# Altium PCB DIO_RJ45_DIOT.PCBDOC (part 2 of 6)
Units mil, origin at the board's own origin, x right, y up, seen from the top; angles counter-clockwise.
Board outline 8758.72 x 3941.04 mil, 4 copper layers (TopLayer, MidLayer1, Internal Plane 1, BottomLayer), stack 46.562 mil thick; 318 components, 196 nets, 1276 pads, 687 vias.
Unrouted connection lines stored in the file: 2.
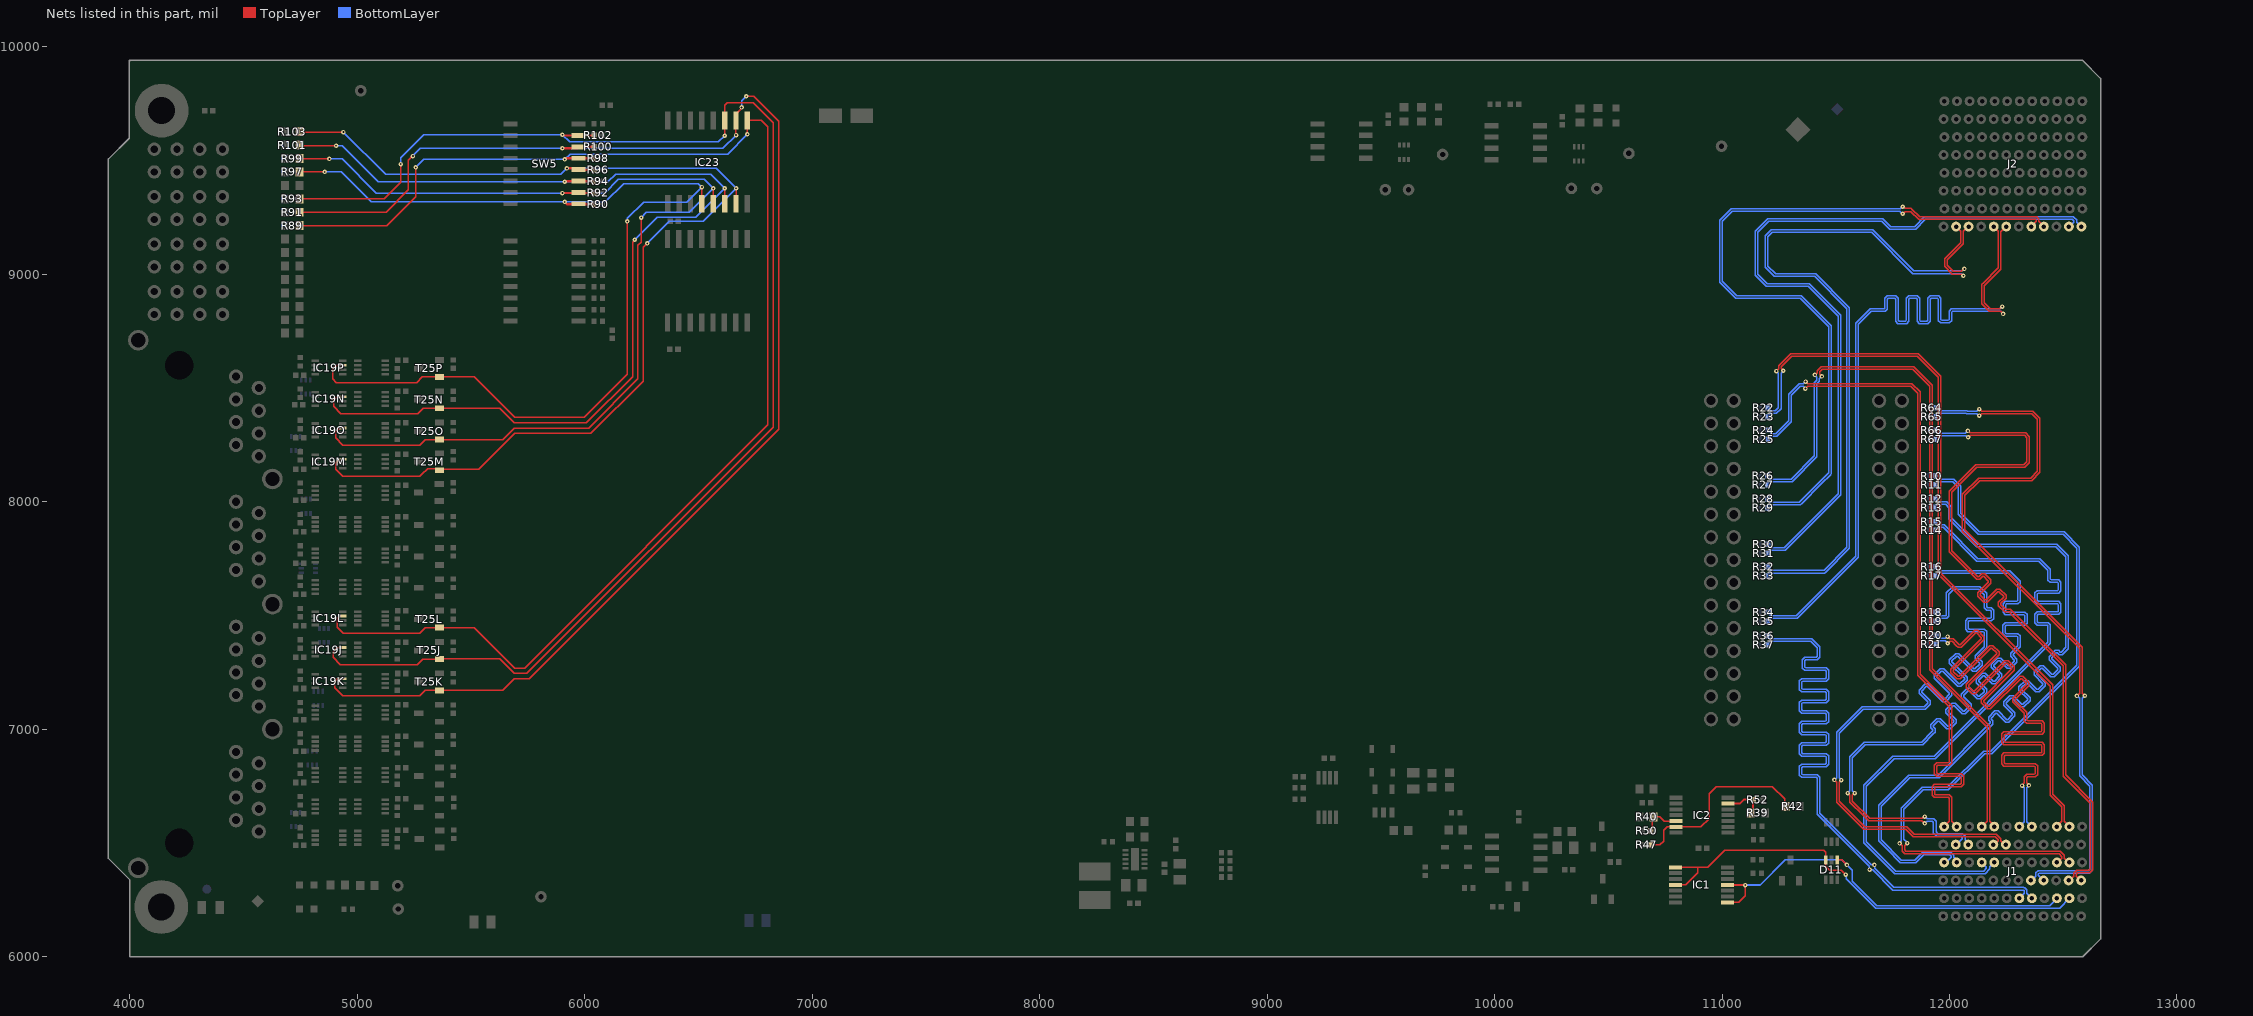
[diagram p4: the nets of this part, all layers, seen from the top]

## Footprints (in the part's own frame and the unit in brackets; to place one, negate y for a bottom-side part, rotate by r counter-clockwise, add the part's x,y. Pads: shape width x height; smd on the part's side, far side on the other; paste and mask are expansions set on the pad) (continued)
SOT95P280X145-5N [mm] "SOT, 0.95mm pitch; 5 pin, 1.60mm W X 2.90mm L X 1.45mm H body, IPC Medium Density"
  rect 1.1x0.6 smd: 1(-1.3,0.95) 2(-1.3,0) 3(-1.3,-0.95) 4(1.3,-0.95) 5(1.3,0.95)
  silkscreen extent -1.72,-1.45 0.43,1.87, body extent -1.4,-1.5 1.4,1.5, height 1.45
SOTFL50P160X60-6N [mm] "SOTFL (SOT666), 0.50mm, Pitch; 6 Pin, 1.20mm W X 1.60mm L X 0.60mm H Body, IPC Medium Density"
  rect 0.57x0.3 smd: 1(-0.79,0.5) 2(-0.79,0) 3(-0.79,-0.5) 4(0.79,-0.5) 5(0.79,0) 6(0.79,0.5)
  silkscreen extent -1.22,-0.8 0,1.27, body extent -0.85,-0.85 0.85,0.85, height 0.6
SW_TYCO_1-1571983-0 [mm] "Pitch 1.27mm,  Body 11.28x6.2mm, 8 Ways SPST Surface-Mount DIP Switch, TYCO GDH Serie"
  rect 1.55x0.55 smd: 1(-3.8,4.445) 2(-3.8,3.175) 3(-3.8,1.905) 4(-3.8,0.635) 5(-3.8,-0.635) 6(-3.8,-1.905) 7(-3.8,-3.175) 8(-3.8,-4.445) 9(3.8,-4.445) 10(3.8,-3.175) 11(3.8,-1.905) 12(3.8,-0.635) 13(3.8,0.635) 14(3.8,1.905) 15(3.8,3.175) 16(3.8,4.445)
  silkscreen extent -4.43,-5.65 2.7,5.65, body extent -4.06,-5.64 4.06,5.64, height 2.36
TYCO_5406203-3 [mm] "4 x RJ45 Jacks - 8 Positions"
  round 1.6 hole 0.9: 1A(-16.51,1.27) 1B(-2.54,1.27) 1C(11.43,1.27) 1D(25.4,1.27) 2A(-17.78,-1.27) 2B(-3.81,-1.27) 2C(10.16,-1.27) 2D(24.13,-1.27) 3A(-19.05,1.27) 3B(-5.08,1.27) 3C(8.89,1.27) 3D(22.86,1.27) 4A(-20.32,-1.27) 4B(-6.35,-1.27) 4C(7.62,-1.27) 4D(21.59,-1.27) 5A(-21.59,1.27) 5B(-7.62,1.27) 5C(6.35,1.27) 5D(20.32,1.27) 6A(-22.86,-1.27) 6B(-8.89,-1.27) 6C(5.08,-1.27) 6D(19.05,-1.27) 7A(-24.13,1.27) 7B(-10.16,1.27) 7C(3.81,1.27) 7D(17.78,1.27) 8A(-25.4,-1.27) 8B(-11.43,-1.27) 8C(2.54,-1.27) 8D(16.51,-1.27)
  round 0.5 hole 3.2 unplated mask+1.35: M1(26.67,7.62) M2(-26.67,7.62)
  round 2.3 hole 1.6: SH(-29.46,12.19) SH(-13.97,-2.792) SH(0,-2.792) SH(13.97,-2.792) SH(29.46,12.19)
  silkscreen extent -30.51,-2.92 30.51,18.42, body extent -30.51,-2.92 30.51,18.42, height 14.55

## Part data
B1 B2 B3 B4 B5 B6 B7 B8 B9 B10 B11: library part PLATED_HOLE0.6_PAD1.3, "Single Terminal Socket", Author="CERN DEM MR", Component Type="Standard (No BOM)", ComponentHeight=0mm, CreateDate=02.03.2016, Family="Plated Hole", HelpURL=Undefined, LatestRevisionDate=02.03.2016, Mounted=No, PackageDescription="Plated Through Hole: Hole Dia.=0.6mm Pad Dia.=1.3mm", Part Description="Plated Through Hole: Hole Dia.=0.6mm Pad Dia.=1.3mm", Part Number=PLATED_HOLE0.6_PAD1.3, Pin Count=1, Sense=No, SMD=No, Socket=No, Status=None
C1: library part CC0402_22PF_50V_5%_C0G, "Non-polarised capacitor", Case=0402, Manufacturer=GENERIC, Manufacturer1 ComponentHeight=0.55mm, Manufacturer1 Example=KEMET, Manufacturer1 Part Number=C0402C220J5GACTU, Tolerance=±5%, Voltage=50V, Author="CERN DEM JLC", Component Type=Standard, CreateDate=2007-12-03, HelpURL="\\cern.ch\dfs\Applications\Altium\Datasheets\CC0402_C0G_KEMET_(Commercial Grade).pdf", LatestRevisionDate=2007-12-03, Manufacturer Part Number=CC0402_22PF_50V_5%_C0G, Mounted=Yes, Part Description="SMD Multilayer Chip Ceramic Capacitor", Part Number=CC0402_22PF_50V_5%_C0G, Pin Count=2, Sense=No, SMD=Yes, Socket=No, Status=Preferred, TC=C0G/NP0
C3 C5 C8 C10 C46A C46B C46C C46D C46E C46F C46G C46H C46I C46J C46K C46L C46M C46N C46O C46P C47A C47B C47C C47D C47E C47F C47G C47H C47I C47J C47K C47L C47M C47N C47O C47P C57 C58 C60 C61 C63 C64 C65 C67: library part CC0402_100NF_16V_10%_X5R, "Non-polarised capacitor", Case=0402, Manufacturer=GENERIC, Manufacturer1 ComponentHeight=0.55mm, Manufacturer1 Example=MURATA, Manufacturer1 Part Number=GRM155R61C104KA88D, Tolerance=±10%, Voltage=16V, Author="CERN DEM JLC", Component Type=Standard, CreateDate=10.12.2013, HelpURL=\\cern.ch\dfs\Applications\Altium\Datasheets\CC0402_X5R_MURATA_GRM.pdf, LatestRevisionDate=10.12.2013, Manufacturer Part Number=CC0402_100NF_16V_10%_X5R, Mounted=Yes, Part Description="SMD Multilayer Chip Ceramic Capacitor", Part Number=CC0402_100NF_16V_10%_X5R, Pin Count=2, Sense=No, SMD=Yes, Socket=No, Status=None, TC=X5R
C4: library part CC0603_100NF_50V_10%_X7R, "Non-polarised capacitor", Case=0603, Manufacturer=GENERIC, Manufacturer1 ComponentHeight=0.87mm, Manufacturer1 Example=PHYCOMP, Manufacturer1 Part Number=223858615649, Tolerance=±10%, Voltage=50V, Author="CERN DEM JLC", Component Type=Standard, CreateDate=03.12.2007, HelpURL=\\cern.ch\dfs\Applications\Altium\Datasheets\CC0603_X7R_PHYCOMP.pdf, LatestRevisionDate=03.12.2007, Manufacturer Part Number=CC0603_100NF_50V_10%_X7R, Mounted=Yes, Part Description="SMD Multilayer Chip Ceramic Capacitor", Part Number=CC0603_100NF_50V_10%_X7R, Pin Count=2, Sense=No, SMD=Yes, Socket=No, Status=Preferred, TC=X7R
C7 C25 C66 C68: library part CC0805_22UF_16V_10%_X5R, "Non-polarised capacitor", Case=0805, Manufacturer=GENERIC, Manufacturer1 ComponentHeight=1.35mm, Manufacturer1 Example=TDK, Manufacturer1 Part Number=C2012X5R1C226KT, Tolerance=±10%, Voltage=16V, Author="CERN DEM JLC", Component Type=Standard, CreateDate=25.10.2012, HelpURL=\\cern.ch\dfs\Applications\Altium\Datasheets\CC0805_X5R_TDK_C.pdf, LatestRevisionDate=25.10.2012, Manufacturer Part Number=CC0805_22UF_16V_10%_X5R, Mounted=Yes, Part Description="SMD Multilayer Chip Ceramic Capacitor", Part Number=CC0805_22UF_16V_10%_X5R, Pin Count=2, Sense=No, SMD=Yes, Socket=No, Status=Preferred, TC=X5R
C9: library part CC0603_1UF_16V_10%_X7R, "Non-polarised capacitor", Case=0603, Manufacturer=GENERIC, Manufacturer1 ComponentHeight=0.9mm, Manufacturer1 Example="YAGEO PHYCOMP", Manufacturer1 Part Number=223878615663, Tolerance=±10%, Voltage=16V, Author="CERN DEM JLC", Component Type=Standard, CreateDate=03.12.2007, HelpURL=\\cern.ch\dfs\Applications\Altium\Datasheets\CC0603_X7R_PHYCOMP.pdf, LatestRevisionDate=17.04.2015, Manufacturer Part Number=CC0603_1UF_16V_10%_X7R, Mounted=Yes, Part Description="SMD Multilayer Chip Ceramic Capacitor", Part Number=CC0603_1UF_16V_10%_X7R, Pin Count=2, Sense=No, SMD=Yes, Socket=No, Status=None, TC=X7R
C23 C24: library part CC0603_1UF_25V_10%_X7R, "Non-polarised capacitor", Case=0603, Manufacturer=GENERIC, Manufacturer1 ComponentHeight=0.9mm, Manufacturer1 Example=MURATA, Manufacturer1 Part Number=GRM188R71E105KA12D, Tolerance=±10%, Voltage=25V, Author="CERN DEM JLC", Component Type=Standard, CreateDate=18.01.2011, HelpURL=\\cern.ch\dfs\Applications\Altium\Datasheets\CC0603_X7R_MURATA.pdf, LatestRevisionDate=18.01.2011, Manufacturer Part Number=CC0603_1UF_25V_10%_X7R, Mounted=Yes, Part Description="SMD Multilayer Chip Ceramic Capacitor", Part Number=CC0603_1UF_25V_10%_X7R, Pin Count=2, Sense=No, SMD=Yes, Socket=No, Status=None, TC=X7R
C62: library part CAE430-540_10UF_16V_20%, "Polarised capacitor", Case=B, Manufacturer=PANASONIC, Manufacturer Part Number=EEEFK1C100AR, Tolerance=±20%, Voltage=16V, Author="CERN DEM JLC", Component Type=Standard, ComponentHeight=5.8mm, CreateDate=03.12.2007, HelpURL=\\cern.ch\dfs\Applications\Altium\Datasheets\CAE_PANASONIC_FK.pdf, LatestRevisionDate=05.11.2014, Mounted=Yes, Part Description="Aluminum Electrolytic SMT Capacitor", Part Number=CAE430-540_10UF_16V_20%, Pin Count=2, Sense=No, SMD=Yes, Socket=No, Status="Not Recommended"
D1 D2 D3 D4 D5 D6 D7 D8 D9 D10: Manufacturer="ON SEMICONDUCTOR", Voltage=5.5V, Author="CERN DEM JLC", Bonding=No, Component Type=Standard, ComponentHeight=1.75mm, CreateDate=05.12.2012, Device=NUP4114UPXV6T1G, HelpURL=\\cern.ch\dfs\Applications\Altium\Datasheets\NUP4114UPXV6T1G.pdf, LatestRevisionDate=05.12.2012, Manufacturer Part Number=NUP4114UPXV6T1G, Mounted=Yes, PackageDescription="SOTFL (SOT666, SOT563,), 0.50mm, Pitch; 6 Pin, 1.20mm W X 1.60mm L X 0.60mm H Body, IPC Medium Density", Part Description="ESD Protection Diodes Array (8kV) with Low Clamping Voltage", Part Number=NUP4114UPXV6T1G, Pin Count=8, PressFit=No, Sense=No, SMD=Yes, Socket=No
D11 D12: "Fivefold ESD Protection Diode Arrays", Case=SOT363, Manufacturer=NEXPERIA, Power=200W, Voltage=3.3V, Author="CERN DEM WB", Bonding=No, Component Type=Standard, ComponentHeight=1.1mm, CreateDate=05.07.2021, Device=PESD3V3L5UY, HelpURL=\\cern.ch\dfs\Applications\Altium\Datasheets\PESD3V3L5UY.pdf, LatestRevisionDate=05.07.2021, Manufacturer Part Number=PESD3V3L5UY, Mounted=Yes, PackageDescription="SOT363, SC-88, 0.65mm Pitch; 6 Pin, 1.25mm W X 2.00mm L X 1.10mm H body, IPC Medium Density", Part Description="Fivefold ESD Protection Diode Arrays (30kV)", Part Number=PESD3V3L5UY, Pin Count=6, PressFit=No, Sense=No, SMD=Yes, Socket=No
D13 D14 D15 D16: "Schottky Diode", Case=SOD323, Manufacturer=INFINEON, Power=750mA, Voltage=40V, Author="CERN DEM JLC", Bonding=No, Component Type=Standard, ComponentHeight=1.1mm, CreateDate=12.11.2014, Device=BAT165, HelpURL=\\cern.ch\dfs\Applications\Altium\Datasheets\BAT165.pdf, LatestRevisionDate=12.11.2014, Manufacturer Part Number=BAT165, Mounted=Yes, PackageDescription="Small Outline Diode (SOD-323), 1.70mm W X 1.25mm L X 1.10mm H body,  IPC Medium Density", Part Description="Medium Power AF Schottky Diode", Part Number=BAT165, Pin Count=2, PressFit=No, Sense=No, SMD=Yes, Socket=No
FTG21: library part FIDUCIAL_TARGET_C100-200, "Fiducial Target", Author="CERN DEM JLC", Component Type="Standard (No BOM)", ComponentHeight=0mm, CreateDate=09.02.2010, Family=Fiducial, HelpURL=Undefined, LatestRevisionDate=04.04.2012, Mounted=No, PackageDescription="Round Fiducial Target, Top Layer, 1.0mm, Top Solder 2.0mm, Keepout =2.0mm", Part Description="Round Fiducial Target, Top Layer, 1.0mm, Top Solder 2.0mm, Keepout =2.0mm", Part Number=FIDUCIAL_TARGET_C100-200, Pin Count=1, Sense=No, SMD=Yes, Socket=No, Status=None
FTG22 FTG24: library part FIDUCIAL_TARGET_S100-200, "Fiducial Target", Author="CERN DEM JLC", Component Type="Standard (No BOM)", ComponentHeight=0mm, CreateDate=09.02.2010, Family=Fiducial, HelpURL=Undefined, LatestRevisionDate=04.04.2012, Mounted=No, PackageDescription="Square Fiducial Target, Top Layer, 1.0mm, Top Solder 2.0mm, Keepout =2.0mm", Part Description="Square Fiducial Target, Top Layer, 1.0mm, Top Solder 2.0mm, Keepout =2.0mm", Part Number=FIDUCIAL_TARGET_S100-200, Pin Count=1, Sense=No, SMD=Yes, Socket=No, Status=None
FTG23: library part FIDUCIAL_TARGET_S200-400, "Fiducial Target", Author="CERN DEM JLC", Component Type="Standard (No BOM)", ComponentHeight=0mm, CreateDate=02.06.2008, Family=Fiducial, HelpURL=Undefined, LatestRevisionDate=04.04.2012, Mounted=No, PackageDescription="Square Fiducial Target, Top Layer, 2.0mm, Top Solder 4.0mm, Keepout =4.0mm", Part Description="Square Fiducial Target, Top Layer, 2.0mm, Top Solder 4.0mm, Keepout =4.0mm", Part Number=FIDUCIAL_TARGET_S200-400, Pin Count=1, Sense=No, SMD=Yes, Socket=No, Status=None
IC1 IC2: Case=TSSOP14, Manufacturer="NXP SEMICONDUCTORS", Author="CERN DEM JLC", Bonding=No, Component Type=Standard, ComponentHeight=1.1mm, Device=74HC4066PW, HelpURL=\\cern.ch\dfs\Applications\Altium\Datasheets\74HC4066PW.pdf, Manufacturer Part Number=74HC4066PW, Mounted=Yes, Part Description="Quad Single-Pole Single-Throw Analog Switch", Part Number=74HC4066PW, Pin Count=14, PressFit=No, SMD=Yes, Socket=No
  IC1: CreateDate=19.11.2014, LatestRevisionDate=19.11.2014, PackageDescription="SOP, 0.65mm Pitch; 14 Pin, 4.40mm W X 5.00mm L X 1.20mm H body, IPC Medium Density", Sense=No
  IC2: CreateDate=2014-11-19, LatestRevisionDate=2014-11-19, PackageDescription="SOP, 14-Leads, Body 4.4x5mm (max), Pitch 0.65mm, IPC Medium Density", Table="Standard Logic"
IC3: "LinCMOS Timer", Case=SOIC8, Manufacturer="TEXAS INSTRUMENTS", Author="CERN DEM JMW", Bonding=No, Component Type=Standard, ComponentHeight=1.75mm, CreateDate=23.08.2016, Device=TLC555ID, HelpURL=\\cern.ch\dfs\Applications\Altium\Datasheets\TLC555ID.pdf, LatestRevisionDate=23.08.2016, Manufacturer Part Number=TLC555ID, Mounted=Yes, PackageDescription="SOIC 8, Pitch 1.27mm, Body 4x5mm, IPC Medium Density", Part Description="LinCMOS Timer", Part Number=TLC555ID, Pin Count=8, PressFit=No, Sense=No, SMD=Yes, Socket=No
IC4: "Digital Temperature Sensor and Thermal Watchdog with Two-Wire Interface", Case=SSOP8, Manufacturer="TEXAS INSTRUMENTS", Author="CERN DEM JLC", Bonding=No, Component Type=Standard, ComponentHeight=1.09mm, CreateDate=15.10.2012, Device=LM75AIMM/NOPB, HelpURL=\\cern.ch\dfs\Applications\Altium\Datasheets\LM75AIMM-NOPB.pdf, LatestRevisionDate=15.10.2012, Manufacturer Part Number=LM75AIMM/NOPB, Mounted=Yes, PackageDescription="SOP, 0.65mm pitch; 8 pin,3.00mm W X 3.00mm L X 1.09mm H bodyI, PC Medium Density", Part Description="-25° to +100°C ±2°C Digital Temperature Sensor and Thermal Watchdog with Two-Wire Interface", Part Number=LM75AIMM/NOPB, Pin Count=8, PressFit=No, Sense=No, SMD=Yes, Socket=No
IC5: "500mA Peak Output LDO Regulator", Case=SOT23-5, Manufacturer="MICROCHIP TECHNOLOGY", Author="CERN DEM WB", Bonding=No, Component Type=Standard, ComponentHeight=1.45mm, CreateDate=2019-04-16, Device=MIC5219-3.3YM5, HelpURL=\\cern.ch\dfs\Applications\Altium\Datasheets\MIC5219-3.3YM5.pdf, LatestRevisionDate=2019-04-16, Manufacturer Part Number=MIC5219-3.3YM5, Mounted=Yes, PackageDescription="SOT, 0.95mm pitch; 5 pin, 1.60mm W X 2.90mm L X 1.45mm H body, IPC Medium Density", Part Description="3.3V 500mA Peak Output Low Drop-Out  (LDO) Regulator", Part Number=MIC5219-3.3YM5, Pin Count=5, PressFit=No, Sense=No, SMD=Yes, Socket=No
IC19A IC19B IC19C IC19D IC19E IC19F IC19G IC19H IC19I IC19J IC19K IC19L IC19M IC19N IC19O IC19P IC20A IC20B IC20C IC20D IC20E IC20F IC20G IC20H IC20I IC20J IC20K IC20L IC20M IC20N IC20O IC20P: "LVDS Single Port High Speed Repeater", Case=TSSOP8, Manufacturer="FAIRCHILD SEMICONDUCTOR", Author="CERN DEM JLC", Bonding=No, Component Type=Standard, ComponentHeight=0.8mm, CreateDate=08.11.2016, Device=FIN1101K8X, HelpURL=\\cern.ch\dfs\Applications\Altium\Datasheets\FIN1101K8X.pdf, LatestRevisionDate=08.11.2016, Manufacturer Part Number=FIN1101K8X, Mounted=Yes, PackageDescription="SOP, 0.50mm Pitch; 8 pin, 2.30mm W X 2.00mm L X 0.90mm H body, PC Medium Density", Part Description="LVDS Single Port High Speed Repeater", Part Number=FIN1101K8X, Pin Count=8, PressFit=No, Sense=No, SMD=Yes, Socket=No
IC23 IC25: "Remote 8-bit I/O Expander For I2C Bus", Case=SOIC16W, Manufacturer="TEXAS INSTRUMENTS", Author="CERN DEM JLC", Bonding=No, Component Type=Standard, ComponentHeight=2.65mm, CreateDate=01.11.2012, Device=PCF8574ADW, HelpURL=\\cern.ch\dfs\Applications\Altium\Datasheets\PCF8574ADW.pdf, LatestRevisionDate=01.11.2012, Manufacturer Part Number=PCF8574ADW, Mounted=Yes, PackageDescription="SOIC 16, Pitch 1.27mm - Body 7.5x10.3mm, IPC Medium Density", Part Description="Remote 8-bit I/O Expander For I2C Bus", Part Number=PCF8574ADW, Pin Count=16, PressFit=No, Sense=No, SMD=Yes, Socket=No
IC24 IC26: "1.7V-5.5V, 2K I2C™ Serial EEPROMs with EUI-48™ Node Identity", Case=SOIC8, Manufacturer="MICROCHIP TECHNOLOGY", Author="CERN DEM MR", Bonding=No, Component Type=Standard, ComponentHeight=1.75mm, CreateDate=19.07.2016, Device=24AA025E48-I/SN, HelpURL=\\cern.ch\dfs\Applications\Altium\Datasheets\24AA025E48-I-SN.pdf, LatestRevisionDate=19.07.2016, Manufacturer Part Number=24AA025E48-I/SN, Mounted=Yes, PackageDescription="SOIC, 1.27mm Pitch; 8 Pin - Body 4x5mm, IPC Medium Density", Part Description="1.7V-5.5V, 2K I2C™ Serial EEPROMs with EUI-48™ Node Identity", Part Number=24AA025E48-I/SN, Pin Count=8, PressFit=No, Sense=No, SMD=Yes, Socket=No
IC27: "4.75-28VDC to 1-6VDC, 500mA Step-Down Converter With Sleep Mode", Case=SON10, Manufacturer="TEXAS INSTRUMENTS", Author="CERN DEM JMW", Bonding=No, Component Type=Standard, ComponentHeight=0.8mm, CreateDate=11.08.2015, Device=TPS62175DQC, HelpURL=\\cern.ch\dfs\Applications\Altium\Datasheets\TPS62175DQC.pdf, LatestRevisionDate=11.08.2015, Manufacturer Part Number=TPS62175DQC, Mounted=Yes, PackageDescription="SON, 10-Leads, Body 2x3mm, Pitch 0.5mm, Thermal Pad 0.94x2.5mm, IPC Medium Density", Part Description="4.75-28VDC to 1-6VDC, 500mA Step-Down Converter With Sleep Mode", Part Number=TPS62175DQC, Pin Count=11, PressFit=No, Sense=No, SMD=Yes, Socket=No
J1: library part AMPHENOL_10052825-101LF, "72 Contacts Header, 6 Columns, 4 Pairs per Column"
J2: library part AMPHENOL_10052838-101LF, "96 Contacts Header, 8 Columns, 4 Pairs per Column"
J14 J24: library part 3M_N2530-6002RB, "Connector 30 Male", Manufacturer=3M, Manufacturer Part Number=N2530-6002RB, Author="CERN DEM JLC", Component Type=Standard, ComponentHeight=10.03mm, CreateDate=11.02.2009, Family="Header 30", HelpURL=\\cern.ch\dfs\Applications\Altium\Datasheets\3M_N2530-6002RB.pdf, LatestRevisionDate=11.08.2009, Mounted=Yes, Part Description="30 Contacts - Straight .100'' x .100'' Low Profile Four-Wall Header, 2500 Series", Part Number=3M_N2530-6002RB, Pin Count=30, PressFit=No, Sense=No, SMD=No, Socket=No, Status=None
J15: library part TYCO_5406203-3, "Connector 4 x RJ45 + Shield", Manufacturer="TYCO ELECTRONICS", Manufacturer Part Number=5406203-3, Author="CERN DEM JLC", Component Type=Standard, ComponentHeight=13.64mm, CreateDate=30.10.2008, Family=RJ45, HelpURL=\\cern.ch\dfs\Applications\Altium\Datasheets\TYCO_5406203-3.pdf, LatestRevisionDate=30.10.2008, Mounted=Yes, Part Description="Modular RJ45 Jack, 4 Port, 8 Positions, Shielded, Reverse Panel Ground Tabs, Category 5", Part Number=TYCO_5406203-3, Pin Count=33, PressFit=No, Sense=No, SMD=No, Socket=No, Status=None
L2: library part IND_10UH_10%_MURATA-PS_8400, "Inductor With Core", Manufacturer="MURATA POWER SOLUTIONS", Manufacturer Part Number=84103C, Power=950mA, Resistance=0.24R, Tolerance=±10%, Author="CERN DEM JLC", Component Type=Standard, ComponentHeight=2.9mm, CreateDate=02.07.2012, HelpURL=\\cern.ch\dfs\Applications\Altium\Datasheets\IND_MURATA-PS_8400.pdf, LatestRevisionDate=02.07.2012, Mounted=Yes, Part Description="Miniature Surface Mount Power Inductor (8400 Serie)", Part Number=IND_10UH_10%_MURATA-PS_8400, Pin Count=2, Sense=No, SMD=Yes, Socket=No, Status=None
LD1 LD2 LD3 LD4: library part LED_BIVAR_H485CGDL, "LED x4 Green 1C2A-BOT_3C4A_5C6A_7C8A-TOP", Manufacturer=BIVAR, Manufacturer Part Number=H485CGDL, Author="CERN DEM JLC", Bonding=No, Color=Green, Component Type=Standard, ComponentHeight=11.3mm, CreateDate=04.06.2012, HelpURL=\\cern.ch\dfs\Applications\Altium\Datasheets\LED_BIVAR_H485CGDL.pdf, LatestRevisionDate=04.06.2012, Mounted=Yes, PackageDescription="Quad-Level 2mm Green, PCB Edge Mounting  BIVAR H485CHDL", Part Description="Quad-Level 2mm Green LED, PCB Edge Mounting", Part Number=LED_BIVAR_H485CGDL, Pin Count=8, PressFit=No, Sense=No, SMD=No, Socket=No
LD5 LD6 LD7 LD8: library part LED_KINGBRIGHT_KPH-1608CGCK, "LED Green 1C 2A", Manufacturer=KINGBRIGHT, Manufacturer Part Number=KPH-1608CGCK, Author="CERN DEM JLC", Bonding=No, Color=Green, Component Type=Standard, ComponentHeight=0.65mm, CreateDate=03.07.2017, HelpURL=\\cern.ch\dfs\Applications\Altium\Datasheets\LED_KINGBRIGHT_KPH-1608CGCK.pdf, LatestRevisionDate=03.07.2017, Mounted=Yes, PackageDescription="SMT Green LED, Case 0603, Body L 1.6 x W 0.8mm H 0.65mm", Part Description="SMD Green LED, Case 1.6mmX0.8mm(0603), 0.65mm Thickness", Part Number=LED_KINGBRIGHT_KPH-1608CGCK, Pin Count=2, PressFit=No, Sense=No, SMD=Yes, Socket=No
M1 M2: library part PLATED_HOLE3.0_PAD6.0, "Single Terminal Socket", Author="CERN DEM JLC", Component Type="Standard (No BOM)", ComponentHeight=0mm, CreateDate=26.05.2008, Family="Plated Hole", LatestRevisionDate=26.05.2008, Mounted=No, PackageDescription="Plated Through Hole: Hole Dia.=3.0mm Pad Dia.=6.0mm", Part Description="Plated Through Hole: Hole Dia.=3.0mm Pad Dia.=6.0mm", Part Number=PLATED_HOLE3.0_PAD6.0, Pin Count=1, SMD=No, Socket=No, Status=None, Table=Pads
R1 R46 R47 R48 R49 R50 R52 R56 R57 R58 R69 R90 R92 R94 R96 R98 R100 R102 R104 R106 R108 R110 R112 R114 R116 R118 R120 R133A R133B R133C R133D R133E R133F R133G R133H R133I R133J R133K R133L R133M R133N R133O R133P: library part R0402_10K_1%_0.0625W_100PPM, "Resistor - 1%", Case=0402, Manufacturer=GENERIC, Manufacturer1 ComponentHeight=0.4mm, Manufacturer1 Example="YAGEO PHYCOMP", Manufacturer1 Part Number=232270671003L, Power=0.0625W, Tolerance=±1%, Author="CERN DEM JLC", Component Type=Standard, CreateDate=03.12.2007, HelpURL=\\cern.ch\dfs\Applications\Altium\Datasheets\R0402_Phycomp_RC0402.pdf, LatestRevisionDate=17.10.2012, Manufacturer Part Number=R0402_10K_1%_0.0625W_100PPM, Mounted=Yes, Part Description="General Purpose Thick Film Chip Resistor", Part Number=R0402_10K_1%_0.0625W_100PPM, Pin Count=2, Sense=No, SMD=Yes, Socket=No, TC=±100ppm/°C
  R1 R46 R47 R48 R49 R50 R52 R56 R57 R58 R90 R92 R94 R96 R98 R100 R102 R104 R106 R108 R110 R112 R114 R116 R118 R120 R133A R133B R133C R133D R133E R133F R133G R133H R133I R133J R133K R133L R133M R133N R133O R133P: Status="Not recommended"
  R69: PressFit=No, Status="Not Recommended"
R2 R3 R4 R5 R6 R7 R89 R91 R93 R95 R97 R99 R101 R103 R105 R107 R109 R111 R113 R115 R117 R119: library part R0603_220R_1%_0.1W_100PPM, "Resistor - 1%", Case=0603, Manufacturer=GENERIC, Manufacturer1 ComponentHeight=0.55mm, Manufacturer1 Example="NIC COMPONENT", Manufacturer1 Part Number=NRC06F2200TRF, Power=0.1W, Tolerance=±1%, Author="CERN DEM JLC", Component Type=Standard, CreateDate=03.12.2007, HelpURL=\\cern.ch\dfs\Applications\Altium\Datasheets\R0603_NIC_NRC.pdf, LatestRevisionDate=13.03.2008, Manufacturer Part Number=R0603_220R_1%_0.1W_100PPM, Mounted=Yes, Part Description="General Purpose Thick Film Chip Resistor", Part Number=R0603_220R_1%_0.1W_100PPM, Pin Count=2, Sense=No, SMD=Yes, Socket=No, Status=Preferred, TC=±100ppm/°C
R8: library part R0805_1M1_1%_0.125W_100PPM, "Resistor - 1%", Case=0805, Manufacturer=GENERIC, Manufacturer1 ComponentHeight=0.6mm, Manufacturer1 Example="NIC COMPONENT", Manufacturer1 Part Number=NRC10F1104TRF, Author="CERN DEM JLC", Component Type=Standard, CreateDate=03/12/2007, HelpURL=\\cern.ch\dfs\Applications\Altium\Datasheets\R0805_NIC_NRC.pdf, LatestRevisionDate=13/03/2008, Manufacturer Part Number=R0805_1M1_1%_0.125W_100PPM, Mounted=Yes, Part Description="General Purpose Thick Film Chip Resistor", Part Number=R0805_1M1_1%_0.125W_100PPM, Pin Count=2, PressFit=No, Sense=No, SMD=Yes, Socket=No, Status=Preferred
R10 R11 R12 R13 R14 R15 R16 R17 R18 R19 R20 R21 R22 R23 R24 R25 R26 R27 R28 R29 R30 R31 R32 R33 R34 R35 R36 R37 R53 R54 R61 R64 R65 R66 R67 R68 R70 R71 R72: library part R0402_0R_JUMPER, "Resistor", Case=0402, Manufacturer=GENERIC, Manufacturer1 ComponentHeight=0.4mm, Manufacturer1 Example="YAGEO PHYCOMP", Manufacturer1 Part Number=232270591001L, Author="CERN DEM JLC", Component Type=Standard, CreateDate=03.12.2007, HelpURL=\\cern.ch\dfs\Applications\Altium\Datasheets\R0402_Phycomp_RC0402.pdf, LatestRevisionDate=17.10.2012, Manufacturer Part Number=R0402_0R_JUMPER, Mounted=Yes, Part Description="1A (0.05R Max DC Resistance) Zero Ohm Jumper", Part Number=R0402_0R_JUMPER, Pin Count=2, Sense=No, SMD=Yes, Socket=No, Status="Not recommended"
R38 R44 R59 R60: library part R0603_0R_JUMPER, "Resistor", Case=0603, Manufacturer=GENERIC, Manufacturer1 ComponentHeight=0.55mm, Manufacturer1 Example="NIC COMPONENT", Manufacturer1 Part Number=NRC06Z0, Author="CERN DEM JLC", Component Type=Standard, CreateDate=03.12.2007, HelpURL=\\cern.ch\dfs\Applications\Altium\Datasheets\R0603_NIC_NRC.pdf, LatestRevisionDate=13.03.2008, Manufacturer Part Number=R0603_0R_JUMPER, Mounted=Yes, Part Description="1A (0.05R Max DC Resistance) Zero Ohm Jumper", Part Number=R0603_0R_JUMPER, Pin Count=2, PressFit=No, Sense=No, SMD=Yes, Socket=No, Status=Preferred
R39 R40 R42: library part R0603_33R_1%_0.1W_100PPM, "Resistor - 1%", Case=0603, Manufacturer=GENERIC, Manufacturer1 ComponentHeight=0.55mm, Manufacturer1 Example="NIC COMPONENT", Manufacturer1 Part Number=NRC06F33R0TRF, Power=0.1W, Tolerance=±1%, Author="CERN DEM JLC", Component Type=Standard, CreateDate=03.12.2007, HelpURL=\\cern.ch\dfs\Applications\Altium\Datasheets\R0603_NIC_NRC.pdf, LatestRevisionDate=13.03.2008, Manufacturer Part Number=R0603_33R_1%_0.1W_100PPM, Mounted=Yes, Part Description="General Purpose Thick Film Chip Resistor", Part Number=R0603_33R_1%_0.1W_100PPM, Pin Count=2, PressFit=No, Sense=No, SMD=Yes, Socket=No, Status=Preferred, TC=±100ppm/°C
R41 R43: library part "Resistor - 1%", "Resistor - 1%", Tolerance=1%
R45: library part R0402_200R_1%_0.0625W_100PPM, "Resistor - 1%", Case=0402, Manufacturer=GENERIC, Manufacturer1 ComponentHeight=0.4mm, Manufacturer1 Example="YAGEO PHYCOMP", Manufacturer1 Part Number=232270672001L, Power=0.0625W, Tolerance=±1%, Author="CERN DEM JLC", Component Type=Standard, CreateDate=2007-12-03, HelpURL=\\cern.ch\dfs\Applications\Altium\Datasheets\R0402_Phycomp_RC0402.pdf, LatestRevisionDate=2012-10-17, Manufacturer Part Number=R0402_200R_1%_0.0625W_100PPM, Mounted=Yes, Part Description="General Purpose Thick Film Chip Resistor", Part Number=R0402_200R_1%_0.0625W_100PPM, Pin Count=2, PressFit=No, Sense=No, SMD=Yes, Socket=No, Status="Not Recommended", TC=±100ppm/°C
R51 R55: library part R0603_2K7_1%_0.1W_100PPM, "Resistor - 1%", Case=0603, Manufacturer=GENERIC, Manufacturer1 ComponentHeight=0.55mm, Manufacturer1 Example="YAGEO PHYCOMP", Manufacturer1 Part Number=RC0603FR-072K7L, Power=0.1W, Tolerance=±1%, Author="CERN DEM JLC", Component Type=Standard, CreateDate=02.05.2011, HelpURL=\\cern.ch\dfs\Applications\Altium\Datasheets\R0603_PHYCOMP_RC0603.pdf, LatestRevisionDate=02.05.2011, Manufacturer Part Number=R0603_2K7_1%_0.1W_100PPM, Mounted=Yes, Part Description="General Purpose Thick Film Chip Resistor", Part Number=R0603_2K7_1%_0.1W_100PPM, Pin Count=2, PressFit=No, Sense=No, SMD=Yes, Socket=No, Status=Preferred, TC=±100ppm/°C
R62 R63: library part "R0805_10M_1%_0.125W_100PPM_VISHAY_CRCW e3", "Resistor - 1%", Case=0805, Manufacturer="VISHAY DALE", Manufacturer Part Number=CRCW080510M0FKEA, Power=0.125W, Tolerance=±1%, Author="CERN DEM BC", Component Type=Standard, ComponentHeight=0.5mm, CreateDate=2019-11-12, HelpURL="\\cern.ch\dfs\Applications\Altium\Datasheets\R0805_VISHAY_CRCW e3.pdf", LatestRevisionDate=2019-11-12, Mounted=Yes, Part Description="150V, Standard Thick Film Chip Resistor", Part Number="R0805_10M_1%_0.125W_100PPM_VISHAY_CRCW e3", Pin Count=2, PressFit=No, Sense=No, SMD=Yes, Socket=No, Status=None, TC=±100ppm/°C
R121: library part R0603_270K_1%_0.1W_100PPM, "Resistor - 1%", Case=0603, Manufacturer=GENERIC, Manufacturer1 ComponentHeight=0.55mm, Manufacturer1 Example="NIC COMPONENT", Manufacturer1 Part Number=NRC06F2703TRF, Power=0.1W, Tolerance=±1%, Author="CERN DEM JLC", Component Type=Standard, CreateDate=03.12.2007, HelpURL=\\cern.ch\dfs\Applications\Altium\Datasheets\R0603_NIC_NRC.pdf, LatestRevisionDate=13.03.2008, Manufacturer Part Number=R0603_270K_1%_0.1W_100PPM, Mounted=Yes, Part Description="General Purpose Thick Film Chip Resistor", Part Number=R0603_270K_1%_0.1W_100PPM, Pin Count=2, Sense=No, SMD=Yes, Socket=No, Status=Preferred, TC=±100ppm/°C
R122: library part R0603_82K_1%_0.1W_100PPM, "Resistor - 1%", Case=0603, Manufacturer=GENERIC, Manufacturer1 ComponentHeight=0.55mm, Manufacturer1 Example="NIC COMPONENT", Manufacturer1 Part Number=NRC06F8202TRF, Power=0.1W, Tolerance=±1%, Author="CERN DEM JLC", Component Type=Standard, CreateDate=03.12.2007, HelpURL=\\cern.ch\dfs\Applications\Altium\Datasheets\R0603_NIC_NRC.pdf, LatestRevisionDate=13.03.2008, Manufacturer Part Number=R0603_82K_1%_0.1W_100PPM, Mounted=Yes, Part Description="General Purpose Thick Film Chip Resistor", Part Number=R0603_82K_1%_0.1W_100PPM, Pin Count=2, Sense=No, SMD=Yes, Socket=No, Status=Preferred, TC=±100ppm/°C
R131A R131B R131C R131D R131E R131F R131G R131H R131I R131J R131K R131L R131M R131N R131O R131P R132A R132B R132C R132D R132E R132F R132G R132H R132I R132J R132K R132L R132M R132N R132O R132P: library part R0402_100R_1%_0.1W_100PPM, "Resistor - 1%", Case=0402, Manufacturer=GENERIC, Manufacturer1 ComponentHeight=0.4mm, Manufacturer1 Example=PANASONIC, Manufacturer1 Part Number=ERJ2RKF1000X, Manufacturer Part Number=R0402_100R_1%_0.1W_100PPM_50V, Power=0.1W, Tolerance=±1%, Voltage=50V, Author="CERN DEM JLC", Component Type=Standard, CreateDate=12.12.2013, HelpURL=\\cern.ch\dfs\Applications\Altium\Datasheets\R0402_PANASONIC_ERJ2RK.pdf, LatestRevisionDate=03.03.2015, Mounted=Yes, Part Description="General Purpose Thick Film Chip Resistor", Part Number=R0402_100R_1%_0.1W_100PPM, Pin Count=2, Sense=No, SMD=Yes, Socket=No, Status="Not recommended", TC=±100ppm/°C
SW5 SW6: library part SW_TYCO_1-1571983-0, "8 Ways SPST DIP Switch", Manufacturer=TYCO, Manufacturer Part Number="1-1571983-0 or GDH08S04", Author="CERN DEM JLC", Component Type=Standard, ComponentHeight=2.31mm, CreateDate=08.01.2009, Family=Switch, HelpURL=\\cern.ch\dfs\Applications\Altium\Datasheets\SW_TYCO_1-1571983-0.pdf, LatestRevisionDate=08.01.2009, Mounted=Yes, PackageDescription="Pitch 1.27mm,  Body 11.28x6.2mm, 8 Ways SPST Surface-Mount DIP Switch,TYCO GDH Serie", Part Description="8 Way SPST SMD DIP Switch, Latched, Contact Rating 0.025A 24VDC", Part Number=SW_TYCO_1-1571983-0, Pin Count=16, PressFit=No, Sense=No, SMD=Yes, Socket=No, Status=None
T1 T2 T3 T4: "N-CHANNEL MOSFET WITH DIODE", Case=SOT23-3, Manufacturer="ON SEMICONDUCTOR", Manufacturer Part Number=BSS138L, Author="CERN DEM JLC", Bonding=No, Component Type=Standard, ComponentHeight=1.11mm, CreateDate=23.03.2009, Device=BSS138LT1G, HelpURL=\\cern.ch\dfs\Applications\Altium\Datasheets\BSS138LT1G.pdf, LatestRevisionDate=25.05.2022, Mounted=Yes, PackageDescription="SOT23, 0.95mm Pitch; 3 Pin, 1.40mm W X 3.00mm L X 1.10mm H body, IPC Medium Density", Part Description="50V, 200mA N-Channel Enhancement Mode Field-Effect Transistor", Part Number=BSS138LT1G, Pin Count=3, PressFit=No, Sense=No, SMD=Yes, Socket=No
T25A T25B T25C T25D T25E T25F T25G T25H T25I T25J T25K T25L T25M T25N T25O T25P: "N-CHANNEL MOSFET WITH DIODE", Case=SOT23-3, Manufacturer="ON SEMICONDUCTOR", Author="CERN DEM JLC", Bonding=No, Component Type=Standard, ComponentHeight=1.11mm, CreateDate=23.03.2009, Device=BSS138LT1G, HelpURL=\\cern.ch\dfs\Applications\Altium\Datasheets\BSS138LT1G.pdf, LatestRevisionDate=23.03.2009, Manufacturer Part Number=BSS138LT1G, Mounted=Yes, PackageDescription="SOT23 3-Leads, Pitch 0.95mm - Body 1.4x3mm, IPC Medium Density", Part Description="50V 200mA N-Channel Enhancement Mode Field-Effect Transistor", Part Number=BSS138LT1G, Pin Count=3, PressFit=No, Sense=No, SMD=Yes, Socket=No

## Via types
v1: diameter 19.68, hole 7.87, TopLayer to BottomLayer, tented both sides, 672 vias
v2: diameter 31.5, hole 19.68, TopLayer to BottomLayer, 10 vias
v3: diameter 23.62, hole 11.81, TopLayer to BottomLayer, tented both sides, 5 vias

## Nets (pads, with @x,y where several pads share a name; then routed paths per layer and width w, separated by ;. In a path a pad name is that pad's centre, name@x,y a point inside that pad or via, vN(x,y) a via of type N, cw(c..) or ccw(c..) an arc to the next point about the centre after c; other vN are vias at no path point)
BGA0: IC2.6 R39.2 R52.2 | length 177.2
  TopLayer w8: IC2.6@11026.58,6672.24 11077.76,6672.24 11095.47,6689.96 R52.2@11132.04,6689.96 ; R39.2@11125.98,6630.91 11135.77,6640.7 11135.77,6686.76 R52.2@11138.98,6689.96
BGA1: IC2.12 R40.2 R50.2 | length 172.6
  TopLayer w6: R50.2@10686.81,6552.41 10693.9,6559.5 10693.9,6607.78 R40.2@10699.8,6613.68 10727.36,6613.68 10745.57,6595.47 IC2.12@10798.23,6595.47
BGA2: IC2.13 R42.2 R47.2 | length 829.3
  TopLayer w6: 10699.8,6491.14 10727.36,6491.14 10743.11,6506.89 10743.11,6554.13 10758.86,6569.88 IC2.13@10798.23,6569.88 10907.48,6569.88 10942.91,6605.31 10942.91,6714.57 10975.39,6747.05 11221.46,6747.05 11275.59,6692.92 R42.2@11275.59,6659.45
BP_I2C.SCL: D11.3 IC1.8 IC1.11 J1.B2 | length 2068.2
  TopLayer w6: IC1.11@10798.23,6314.96 10839.57,6314.96 10892.72,6368.11 10892.72,6391.73 ; IC1.8@10798.23,6391.73 10892.72,6391.73 ; v1(11544.29,6360.24) 11524.46,6380.07 11473.34,6380.07 11456.12,6397.28 11456.12,6457.27 11446.85,6466.54 11011.81,6466.54 10937.01,6391.73 10892.72,6391.73
  BottomLayer w6: v1(11544.29,6360.24) 11546.91,6357.62 11546.91,6341.66 11676.15,6212.42 12484.07,6212.42 J1.B2@12527.56,6255.91
BP_I2C.SDA: D11.1 IC1.1 IC1.4 J1.C2 | length 1808.5
  TopLayer w6: D11.1@11506.89,6424.21 11507.87,6425.2 11526.57,6425.2 v1(11549.21,6402.56)
  TopLayer w8: IC1.1@11024.61,6238.19 11072.83,6238.19 11102.54,6267.9 v1(11102.54,6313.75) 11101.33,6314.96 IC1.4@11024.61,6314.96
  BottomLayer w6: v1(11549.21,6402.56) 11572.83,6378.94 11572.83,6331.29 11680.71,6223.42 12441.41,6223.42 12472.44,6254.45 J1.C2@12472.44,6255.91
  BottomLayer w8: v1(11102.54,6313.75) 11167.1,6313.75 11278.54,6425.2 11526.57,6425.2 v1(11549.21,6402.56)
BP_IO.BP_LVDS0_N: J1.E3 R65.1 | length 3249.6
  TopLayer w6: v1(12131.2,8378.16) 12132.84,8378.16 12141.56,8386.88 12361.15,8386.88 12386.81,8361.22 12386.81,8132.87 12357.19,8103.25 12128.05,8103.25 12056.91,8032.12 12056.91,7870.44 12572.48,7354.88 12572.48,7158.04 12560.34,7145.9 v1(12560.34,7145.52)
  BottomLayer w6: R65.1@11940.46,8373.09 11940.46,8373.88 11948.87,8382.29 11949.66,8382.29 11955.16,8387.8 12073.36,8387.8 12074.28,8386.88 12120.84,8386.88 12129.56,8378.16 v1(12131.2,8378.16) ; J1.E3@12358.27,6334.65 12360.59,6334.65 12379.06,6353.11 12379.06,6367.5 12389.4,6377.83 12610.89,6377.83 12617.3,6384.25 12617.3,6748.33 12572.13,6793.5 12572.13,7134.47 12561.09,7145.52 v1(12560.34,7145.52)
BP_IO.BP_LVDS0_P: J1.D3 R64.1 | length 3269.2
  TopLayer w6: v1(12130.43,8406.6) 12132.07,8406.6 12140.79,8397.88 12365.71,8397.88 12397.81,8365.78 12397.81,8128.32 12361.74,8092.25 12357.73,8092.25 12357.5,8092.03 12132.38,8092.03 12067.91,8027.56 12067.91,7875 12583.48,7359.43 12583.48,7158.04 12595.24,7146.28 v1(12595.62,7146.28)
  BottomLayer w6: R64.1@11940.46,8412.46 11940.46,8411.67 11948.87,8403.25 11949.66,8403.25 11954.12,8398.8 12077.92,8398.8 12078.83,8397.88 12120.07,8397.88 12128.79,8406.6 v1(12130.43,8406.6) ; J1.D3@12413.39,6334.65 12411.73,6334.65 12390.06,6356.31 12390.06,6362.94 12393.96,6366.83 12615.45,6366.83 12628.3,6379.69 12628.3,6752.88 12583.13,6798.05 12583.13,7135.63 12593.78,7146.28 v1(12595.62,7146.28)
BP_IO.BP_LVDS1_N: J1.B3 R67.1 | length 3169.9
  TopLayer w6: v1(12081.62,8282.21) 12083.26,8282.21 12092.5,8291.45 12329.94,8291.45 12340.16,8281.23 12340.16,8175.46 12326.93,8162.23 12115.18,8162.23 11998.03,8045.09 11998.03,7779.52 12111.46,7666.1 12119.08,7658.48 12133.29,7658.48 12145.73,7670.93 12150.82,7670.93 12171.19,7650.56 12171.19,7645.47 12124.16,7598.44 12124.16,7584.23 12150.96,7557.42 12165.17,7557.42 12212.2,7604.46 12217.29,7604.46 12237.66,7584.09 12237.66,7579 12215.3,7556.64 12215.3,7542.44 12242.1,7515.63 12256.31,7515.63 12256.57,7515.89 12261.66,7515.89 12278.93,7498.63 12499.17,7278.39 12499.17,6793.34 12505.62,6786.9 12619.38,6673.13 12619.38,6385.4 12613.02,6379.04 12559.56,6379.04 12545.68,6365.15 12545.68,6353.08 12527.25,6334.65 J1.B3@12523.62,6334.65
  BottomLayer w6: R67.1@11941.44,8274.06 11941.44,8274.85 11949.86,8283.27 11950.65,8283.27 11956.38,8289.01 12071.27,8289.01 12078.06,8282.21 v1(12081.62,8282.21)
BP_IO.BP_LVDS1_P: J1.A3 R66.1 | length 3188.8
  TopLayer w6: v1(12080.85,8310.65) 12083.01,8310.65 12091.21,8302.45 12334.5,8302.45 12351.16,8285.78 12351.16,8170.9 12331.49,8151.23 12119.73,8151.23 12009.03,8040.53 12009.03,7784.08 12119.24,7673.88 12123.64,7669.48 12128.73,7669.48 12141.18,7681.93 12155.38,7681.93 12182.19,7655.12 12182.19,7640.91 12135.16,7593.88 12135.16,7588.79 12155.52,7568.42 12160.61,7568.42 12207.65,7615.46 12221.85,7615.46 12248.66,7588.65 12248.66,7574.45 12226.3,7552.08 12226.3,7546.99 12246.66,7526.63 12251.75,7526.63 12252.02,7526.89 12266.22,7526.89 12286.71,7506.41 12510.17,7282.94 12510.17,6797.9 12630.38,6677.69 12630.38,6380.84 12617.57,6368.04 12564.12,6368.04 12556.68,6360.6 12556.68,6353.08 12575.12,6334.65 12575.23,6334.65 J1.A3@12578.74,6334.65
  BottomLayer w6: R66.1@11941.44,8313.6 11941.44,8312.81 11954.24,8300.01 12069.67,8300.01 12080.31,8310.65 v1(12080.85,8310.65)
BP_IO.BP_LVDS2_N: J1.C4 R11.1 | length 3323.3
  TopLayer w6: v1(11780.76,6497.07) 11781.8,6497.07 11792.12,6486.75 11792.12,6463.61 11804.26,6451.47 12482.53,6451.47 12494.5,6439.5 12494.5,6431.24 12476.65,6413.39 J1.C4@12472.44,6413.39
  BottomLayer w6: v1(11780.76,6497.07) 11780.76,6500.78 11788.86,6508.87 11788.86,6516.51 11788.79,6516.58 11788.79,6643.6 11788.72,6643.67 11788.72,6652.9 11791.99,6656.16 11876.12,6740.29 11876.31,6740.29 11879.3,6743.28 11990.49,6743.28 12150.29,6903.09 12182,6903.09 12560.04,7281.13 12560.04,7795.1 12499.83,7855.31 12127.16,7855.31 12039.37,7943.11 12039.37,8063.1 12014.82,8087.65 11955.54,8087.65 11950.23,8082.34 11949.86,8082.34 R11.1@11941.44,8073.92 ; J1.C4@12472.44,6413.39 12478.9,6419.84 J1.C4@12475.46,6423.27
BP_IO.BP_LVDS2_P: J1.B4 R10.1 | length 3326.4
  TopLayer w6: v1@11814.54,6496.83 11812.93,6496.83 11803.12,6487.02 11803.12,6468.17 11808.81,6462.47 12487.08,6462.47 12505.5,6444.06 12505.5,6431.24 12523.35,6413.39 J1.B4@12527.56,6413.39
  BottomLayer w6: v1@11814.54,6500.53 11814.54,6501.82 11799.93,6516.44 11799.93,6648.22 11799.86,6648.28 11883.86,6732.28 11995.04,6732.28 12154.85,6892.09 12186.56,6892.09 12571.04,7276.57 12571.04,7799.66 12504.38,7866.31 12131.72,7866.31 12050.37,7947.66 12050.37,8067.65 12019.37,8098.65 11954.23,8098.65 R10.1@11941.44,8111.44
  other v1: 11814.54,6498.57
BP_IO.BP_LVDS3_N: J1.L4 R13.1 | length 3289.8
  BottomLayer w6: R13.1@11941.44,7973.76 11949.86,7982.18 11949.86,7983.93 11953.37,7987.44 11983.04,7987.44 11997.29,7973.19 11997.29,7923.97 12003.73,7917.53 12120.08,7801.18 12468.04,7801.18 12511.11,7758.1 12511.11,7365.86 12511.11,7358.44 12491.14,7338.46 12486.05,7338.46 12479.32,7345.19 12465.12,7345.19 12438.31,7318.38 12438.31,7304.17 12476.07,7266.41 12476.07,7261.32 12455.71,7240.96 12450.62,7240.96 12412.86,7278.72 12398.65,7278.72 12371.84,7251.91 12371.84,7237.71 12409.61,7199.94 12409.61,7194.85 12389.24,7174.49 12384.15,7174.49 12346.39,7212.25 12332.18,7212.25 12305.38,7185.44 12305.38,7171.24 12343.14,7133.48 12343.14,7128.38 12322.77,7108.02 12317.68,7108.02 12279.92,7145.78 12265.72,7145.78 12238.91,7118.97 12238.91,7104.77 12276.67,7067.01 12276.67,7061.92 12256.3,7041.55 12251.21,7041.55 12213.45,7079.31 12199.25,7079.31 12172.44,7052.51 12172.44,7038.3 12179.16,7031.58 12179.16,7026.49 12174.76,7022.09 11950.45,6797.77 11820.41,6797.77 11820.06,6797.42 11688.33,6665.69 11688.33,6508.89 11691.55,6505.66 11732.65,6464.57 11777.7,6419.52 11784.15,6413.07 11852.26,6413.07 11855.48,6416.29 11864.75,6425.56 11886.4,6447.21 12000.63,6447.21 12007.31,6440.52 12007.31,6435.55 11985.14,6413.39 J1.L4@11976.38,6413.39
BP_IO.BP_LVDS3_P: J1.K4 R12.1 | length 3295.3
  BottomLayer w6: R12.1@11941.44,8012.84 11941.44,8012.05 11955.05,7998.44 11987.6,7998.44 12008.29,7977.75 12008.29,7928.53 12124.64,7812.18 12472.59,7812.18 12522.11,7762.66 12522.11,7354.86 12522.11,7353.88 12495.69,7327.46 12481.49,7327.46 12474.77,7334.19 12469.68,7334.19 12449.31,7313.82 12449.31,7308.73 12487.07,7270.97 12487.07,7256.76 12460.26,7229.96 12446.06,7229.96 12408.3,7267.72 12403.21,7267.72 12382.84,7247.35 12382.84,7242.26 12420.61,7204.5 12420.61,7190.3 12393.8,7163.49 12379.59,7163.49 12341.83,7201.25 12336.74,7201.25 12316.38,7180.88 12316.38,7175.79 12354.14,7138.03 12354.14,7123.83 12327.33,7097.02 12313.13,7097.02 12275.36,7134.78 12270.27,7134.78 12249.91,7114.42 12249.91,7109.33 12287.67,7071.56 12287.67,7057.36 12260.86,7030.55 12246.66,7030.55 12208.9,7068.31 12203.8,7068.31 12183.44,7047.95 12183.44,7042.86 12190.16,7036.14 12190.16,7021.93 12182.54,7014.31 11955.01,6786.77 11824.97,6786.77 11824.61,6786.42 11699.33,6661.14 11699.33,6513.44 11788.7,6424.07 11847.7,6424.07 11881.84,6458.21 12005.18,6458.21 12018.31,6445.08 12018.31,6435.55 12031.5,6422.37 J1.K4@12031.5,6413.39
BP_IO.BP_LVDS4_N: J1.I4 R15.1 | length 3223.9
  BottomLayer w6: R15.1@11941.44,7911.8 11949.86,7903.38 11949.86,7901.43 11953.37,7897.91 11976.1,7897.91 11982.55,7891.47 12124.83,7749.19 12396.51,7749.19 12402.96,7742.75 12436.86,7708.84 12443.31,7702.39 12443.31,7665.35 12443.31,7659.13 12446.91,7655.53 12480.02,7655.53 12490.07,7645.49 12490.07,7607.58 12480.02,7597.53 12389.95,7597.53 12386.35,7593.93 12386.35,7565.13 12389.95,7561.53 12480.02,7561.53 12490.07,7551.49 12490.07,7513.58 12480.02,7503.53 12390.45,7503.53 12386.85,7499.93 12386.85,7471.13 12390.45,7467.53 12433.26,7467.53 12443.31,7457.49 12443.31,7376.8 12421.29,7354.78 11943.27,6876.75 11936.82,6870.31 11756.14,6870.31 11633.86,6748.03 11633.86,6504.92 11763.29,6375.49 12150.35,6375.49 12162.5,6387.64 12162.5,6392.61 J1.I4@12141.73,6413.39
BP_IO.BP_LVDS4_P: J1.H4 R14.1 | length 3244.3
  BottomLayer w6: R14.1@11941.44,7873.02 11949.86,7881.44 11949.86,7883.4 11953.37,7886.91 11971.55,7886.91 12120.27,7738.19 12391.96,7738.19 12432.31,7697.84 12432.31,7665.35 12432.31,7654.58 12442.35,7644.53 12475.47,7644.53 12479.07,7640.93 12479.07,7612.13 12475.47,7608.53 12385.39,7608.53 12375.35,7598.49 12375.35,7560.58 12385.39,7550.53 12475.47,7550.53 12479.07,7546.93 12479.07,7518.13 12475.47,7514.53 12385.89,7514.53 12375.85,7504.49 12375.85,7466.58 12385.89,7456.53 12428.71,7456.53 12432.31,7452.93 12432.31,7381.35 12405.73,7354.78 11932.27,6881.31 11751.58,6881.31 11622.86,6752.59 11622.86,6500.36 11758.73,6364.49 12156.82,6364.49 12177.18,6384.86 12177.18,6393.72 J1.H4@12196.85,6413.39
BP_IO.BP_LVDS5_N: J1.K5 R17.1 | length 3273.4
  TopLayer w6: v1(11552.46,6718.47) 11552.46,6718.12 11562.48,6708.11 11562.48,6678.57 11568.92,6672.12 11613.8,6627.24 11620.25,6620.8 11644.16,6596.89 11878.16,6596.89 11890.02,6585.02 v1(11890.85,6585.02)
  BottomLayer w6: v1(11552.46,6718.47) 11552.46,6718.81 11562.48,6728.82 11562.48,6879 11568.92,6885.45 11619,6935.52 11625.44,6941.97 11877.01,6941.97 11921.97,6986.93 11926.37,6991.33 11926.37,6996.43 11917.86,7004.94 11917.86,7019.15 11944.66,7045.96 11958.87,7045.96 11993.47,7011.35 11998.57,7011.35 12018.93,7031.71 12018.93,7036.81 11984.32,7071.41 11984.32,7085.62 12011.13,7112.42 12025.34,7112.42 12059.94,7077.82 12065.03,7077.82 12085.4,7098.18 12085.4,7103.27 12050.79,7137.88 12050.79,7152.08 12077.6,7178.89 12091.8,7178.89 12126.41,7144.29 12131.5,7144.29 12151.87,7164.65 12151.87,7169.74 12117.26,7204.35 12117.26,7218.55 12144.07,7245.36 12158.27,7245.36 12192.88,7210.75 12197.97,7210.75 12218.33,7231.12 12218.33,7236.21 12183.73,7270.82 12183.73,7285.02 12210.54,7311.83 12224.74,7311.83 12259.35,7277.22 12264.44,7277.22 12284.8,7297.59 12284.8,7302.68 12268.36,7319.12 12268.36,7333.32 12300.2,7365.16 12300.2,7376.56 12300.2,7398.94 12300.2,7405.16 12296.6,7408.76 12244.7,7408.76 12234.65,7418.81 12234.65,7456.72 12244.7,7466.76 12326.42,7466.76 12330.02,7470.36 12330.02,7499.16 12326.42,7502.76 12246,7502.76 12235.95,7512.81 12235.95,7550.72 12246,7560.76 12296.6,7560.76 12300.2,7564.36 12300.2,7601.38 12300.2,7645.67 12260.13,7685.74 11953.62,7685.74 11950.38,7682.49 11949.86,7682.49 11941.44,7674.08 R17.1@11941.44,7673.29 ; v1(11890.85,6585.02) 11892.18,6585.02 11901.21,6594.05 11924.8,6594.05 11929.4,6589.46 11929.4,6542.82 11937.37,6534.84 11940.94,6531.27 11944.46,6527.75 12051.84,6527.75 12057.03,6522.56 12057.03,6517.59 12031.57,6492.13 J1.K5@12027.56,6492.13
BP_IO.BP_LVDS5_P: J1.J5 R16.1 | length 3283.9
  TopLayer w6: v1(11583.49,6718.58) 11583.49,6718.24 11573.48,6708.22 11573.48,6683.12 11648.71,6607.89 11880.73,6607.89 11887.92,6615.08 v1(11891.09,6615.08)
  BottomLayer w6: v1(11583.49,6718.58) 11583.49,6718.92 11573.48,6728.94 11573.48,6874.45 11630,6930.97 11881.56,6930.97 11929.75,6979.16 11937.37,6986.78 11937.37,7000.98 11928.86,7009.5 11928.86,7014.59 11949.22,7034.96 11954.31,7034.96 11988.92,7000.35 12003.12,7000.35 12029.93,7027.16 12029.93,7041.36 11995.32,7075.97 11995.32,7081.06 12015.69,7101.42 12020.78,7101.42 12055.39,7066.82 12069.59,7066.82 12096.4,7093.63 12096.4,7107.83 12061.79,7142.44 12061.79,7147.53 12082.16,7167.89 12087.25,7167.89 12121.85,7133.29 12136.06,7133.29 12162.87,7160.09 12162.87,7174.3 12128.26,7208.9 12128.26,7214 12148.62,7234.36 12153.71,7234.36 12188.32,7199.75 12202.52,7199.75 12229.33,7226.56 12229.33,7240.77 12194.73,7275.37 12194.73,7280.46 12215.09,7300.83 12220.18,7300.83 12254.79,7266.22 12268.99,7266.22 12295.8,7293.03 12295.8,7307.23 12279.36,7323.67 12279.36,7328.77 12311.2,7360.6 12311.2,7365.56 12311.2,7398.94 12311.2,7409.72 12301.15,7419.76 12249.25,7419.76 12245.65,7423.36 12245.65,7452.16 12249.25,7455.76 12330.98,7455.76 12341.02,7465.81 12341.02,7503.72 12330.98,7513.76 12250.55,7513.76 12246.95,7517.36 12246.95,7546.16 12250.55,7549.76 12301.15,7549.76 12311.2,7559.81 12311.2,7601.38 12311.2,7650.23 12264.68,7696.74 11957.2,7696.74 11950.49,7703.45 11949.86,7703.45 11941.44,7711.87 R16.1@11941.44,7712.66 ; v1(11891.09,6615.08) 11892.42,6615.08 11901.45,6606.05 11929.77,6606.05 11941.4,6594.43 11941.4,6547.79 11949.43,6539.75 12056.81,6539.75 12069.03,6527.53 12069.03,6514.29 12082.68,6500.65 J1.J5@12082.68,6492.13
BP_IO.BP_LVDS6_N: J1.H5 R19.1 | length 3297.3
  TopLayer w6: v1(11494.43,6776.33) 11494.43,6775.5 11503.97,6765.97 11503.97,6678.48 11510.41,6672.04 11616.95,6565.5 11623.39,6559.06 11808.47,6559.06 11841.07,6526.45 12201.94,6526.45 12214.97,6513.42 12214.97,6508.45 12198.65,6492.13 J1.H5@12192.91,6492.13
  BottomLayer w6: v1(11494.43,6776.33) 11494.43,6777.15 11503.97,6786.69 11503.97,6985.38 11510.41,6991.83 11615.56,7096.98 11888.27,7096.98 11900.65,7109.36 11905.05,7113.76 11905.05,7118.85 11866.74,7157.16 11866.74,7171.36 11893.55,7198.17 11907.76,7198.17 11974.13,7131.79 11979.22,7131.79 11999.59,7152.16 11999.59,7157.25 11933.21,7223.62 11933.21,7237.83 11960.02,7264.64 11974.22,7264.64 12040.6,7198.26 12045.69,7198.26 12066.06,7218.62 12066.06,7223.72 11999.68,7290.09 11999.68,7304.3 12026.49,7331.1 12040.69,7331.1 12107.07,7264.73 12112.16,7264.73 12132.52,7285.09 12132.52,7290.18 12114.1,7308.61 12114.1,7322.81 12150.57,7359.28 12152.96,7361.67 12152.96,7418.16 12152.96,7424.39 12149.36,7427.99 12081.4,7427.99 12071.35,7438.03 12071.35,7475.94 12081.4,7485.99 12180,7485.99 12183.6,7489.59 12183.6,7518.39 12180,7521.99 12163.01,7521.99 12152.96,7532.03 12152.96,7591.32 12149.08,7595.21 12129.3,7614.98 12018.53,7614.98 11997.05,7593.5 11997.05,7496.21 11988.5,7487.67 11953.37,7487.67 11949.86,7484.15 11949.86,7475.01 R19.1@11941.44,7466.59
BP_IO.BP_LVDS6_P: J1.G5 R18.1 | length 3307.9
  TopLayer w6: v1(11524.5,6775.84) 11524.5,6775.01 11514.97,6765.48 11514.97,6683.04 11627.95,6570.06 11813.02,6570.06 11845.62,6537.45 12206.49,6537.45 12225.97,6517.97 12225.97,6508.45 12242.29,6492.13 J1.G5@12248.03,6492.13
  BottomLayer w6: v1(11524.5,6775.84) 11524.5,6776.66 11514.97,6786.19 11514.97,6980.83 11620.11,7085.98 11892.82,7085.98 11908.43,7101.58 11916.05,7109.2 11916.05,7123.41 11877.74,7161.71 11877.74,7166.8 11898.11,7187.17 11903.2,7187.17 11969.58,7120.79 11983.78,7120.79 12010.59,7147.6 12010.59,7161.8 11944.21,7228.18 11944.21,7233.27 11964.58,7253.64 11969.67,7253.64 12036.04,7187.26 12050.25,7187.26 12077.06,7214.07 12077.06,7228.27 12010.68,7294.65 12010.68,7299.74 12031.04,7320.1 12036.14,7320.1 12102.51,7253.73 12116.72,7253.73 12143.52,7280.54 12143.52,7294.74 12125.1,7313.16 12125.1,7318.25 12158.34,7351.5 12163.96,7357.12 12163.96,7418.16 12163.96,7428.94 12153.92,7438.99 12085.95,7438.99 12082.35,7442.59 12082.35,7471.39 12085.95,7474.99 12184.56,7474.99 12194.6,7485.03 12194.6,7522.94 12184.56,7532.99 12167.56,7532.99 12163.96,7536.59 12163.96,7595.21 12163.96,7595.88 12133.86,7625.98 12013.97,7625.98 11986.05,7598.06 11986.05,7500.77 11983.95,7498.67 11953.37,7498.67 11949.86,7502.18 11949.86,7503.73 R18.1@11941.44,7512.15
BP_IO.BP_LVDS7_N: J1.F6 R21.1 | length 3157.8
  TopLayer w6: v1(11992.73,7376.61) 11993.99,7376.61 12003.09,7385.71 12011.8,7385.71 12030.44,7367.06 12038.07,7359.44 12052.27,7359.44 12115.08,7422.25 12120.17,7422.25 12140.54,7401.88 12140.54,7396.79 12006.2,7262.45 12006.2,7248.25 12033.01,7221.44 12047.21,7221.44 12181.55,7355.78 12186.64,7355.78 12207.01,7335.42 12207.01,7330.33 12072.67,7195.99 12072.67,7181.78 12099.47,7154.97 12113.68,7154.97 12248.02,7289.31 12253.11,7289.31 12273.47,7268.95 12273.47,7263.86 12139.13,7129.52 12139.13,7115.31 12165.94,7088.51 12180.15,7088.51 12312.72,7221.08 12317.81,7221.08 12338.17,7200.71 12338.17,7195.62 12277.13,7134.58 12277.13,7120.37 12327.69,7069.81 12329.16,7068.34 12329.16,7045.66 12329.16,7034.88 12339.2,7024.84 12402.49,7024.84 12406.09,7021.24 12406.09,6992.44 12402.49,6988.84 12239.57,6988.84 12229.53,6978.8 12229.53,6940.88 12239.57,6930.84 12402.49,6930.84 12406.09,6927.24 12406.09,6898.44 12402.49,6894.84 12239.57,6894.84 12229.53,6884.8 12229.53,6846.88 12239.57,6836.84 12372.43,6836.84 12376.03,6833.24 12376.03,6804.44 12372.43,6800.84 12339.2,6800.84 12329.16,6790.8 12329.16,6772.04 12329.16,6763.27 12319.19,6753.3 v1(12319.19,6751.11)
  BottomLayer w6: R21.1@11941.44,7373.09 11941.44,7373.88 11949.86,7382.3 11950.65,7382.3 11955.41,7387.06 11981.77,7387.06 11992.22,7376.61 v1(11992.73,7376.61) ; J1.F6@12307.09,6570.87 12328.65,6592.43 12328.65,6662.13 12328.26,6662.51 12328.26,6740.76 12319.19,6749.83 v1(12319.19,6751.11)
BP_IO.BP_LVDS7_P: J1.E6 R20.1 | length 3181.4